# Altium PCB MOTOR_PWR_MS_V1.0.PcbDoc
Units mm, origin at the board's own origin, x right, y up, seen from the top; angles counter-clockwise.
Board outline 26.03 x 34.5 mm, 2 copper layers (Top Layer, Bottom Layer), stack 1.569 mm thick; 3 components, 4 nets, 16 pads, 5 vias.
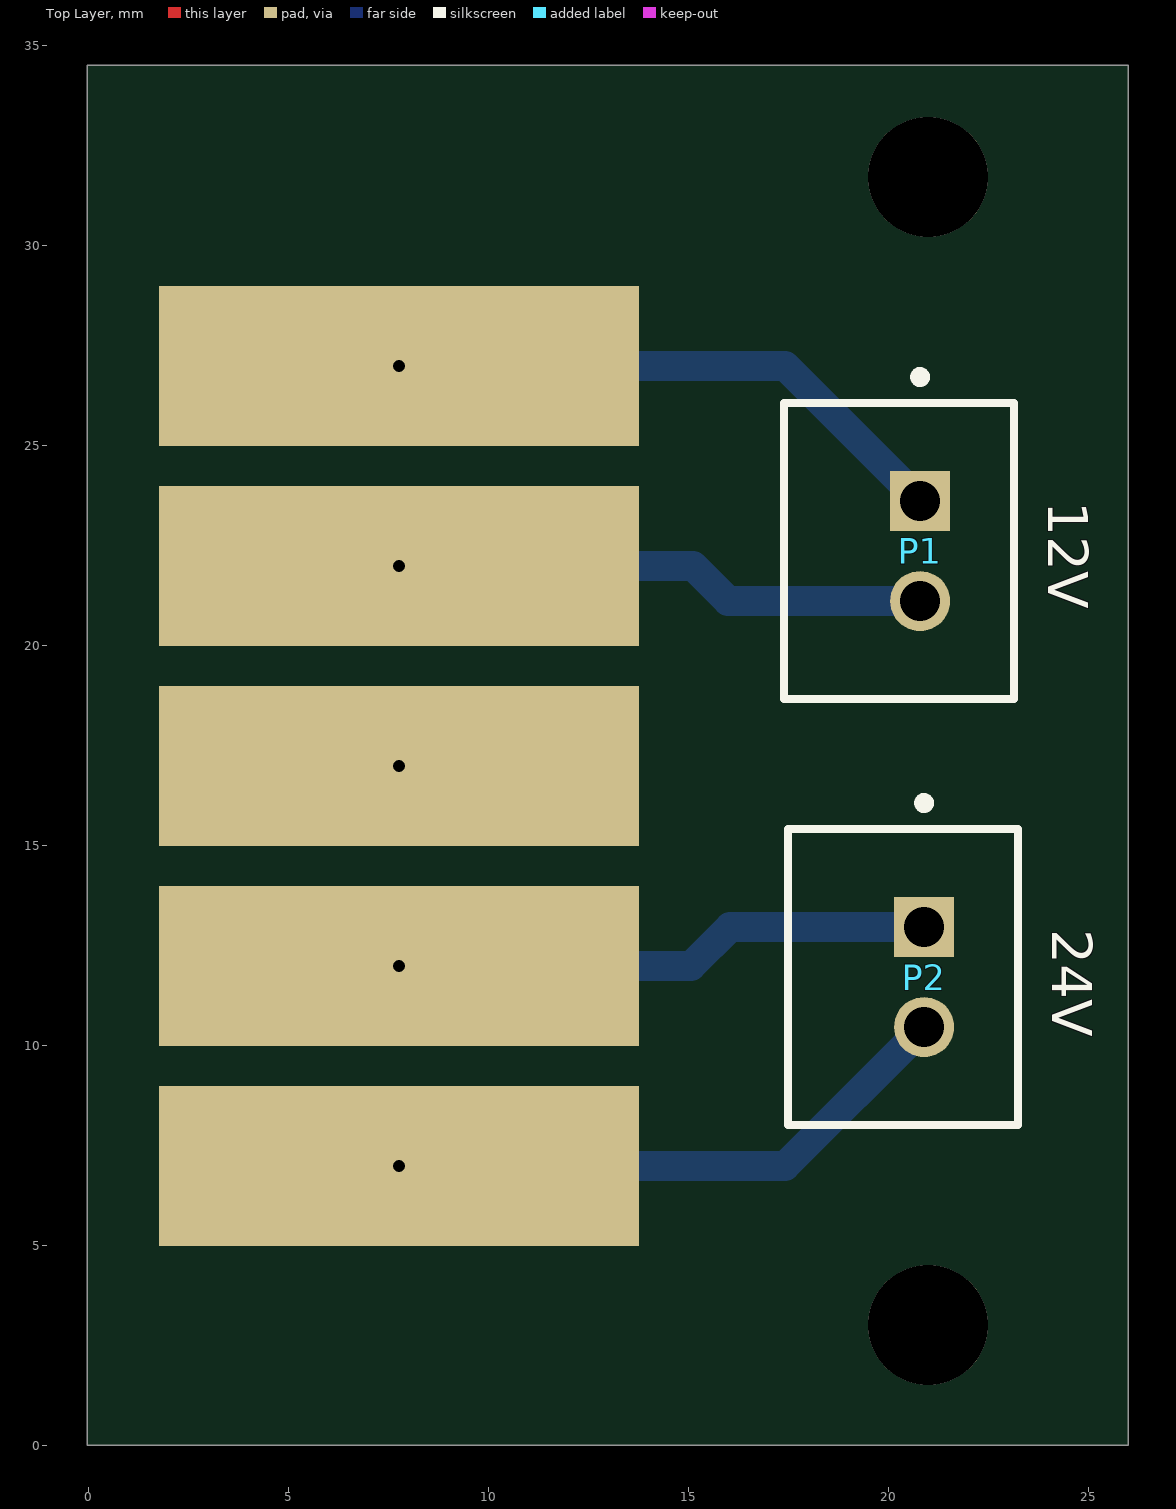
[diagram p0: Top Layer view]
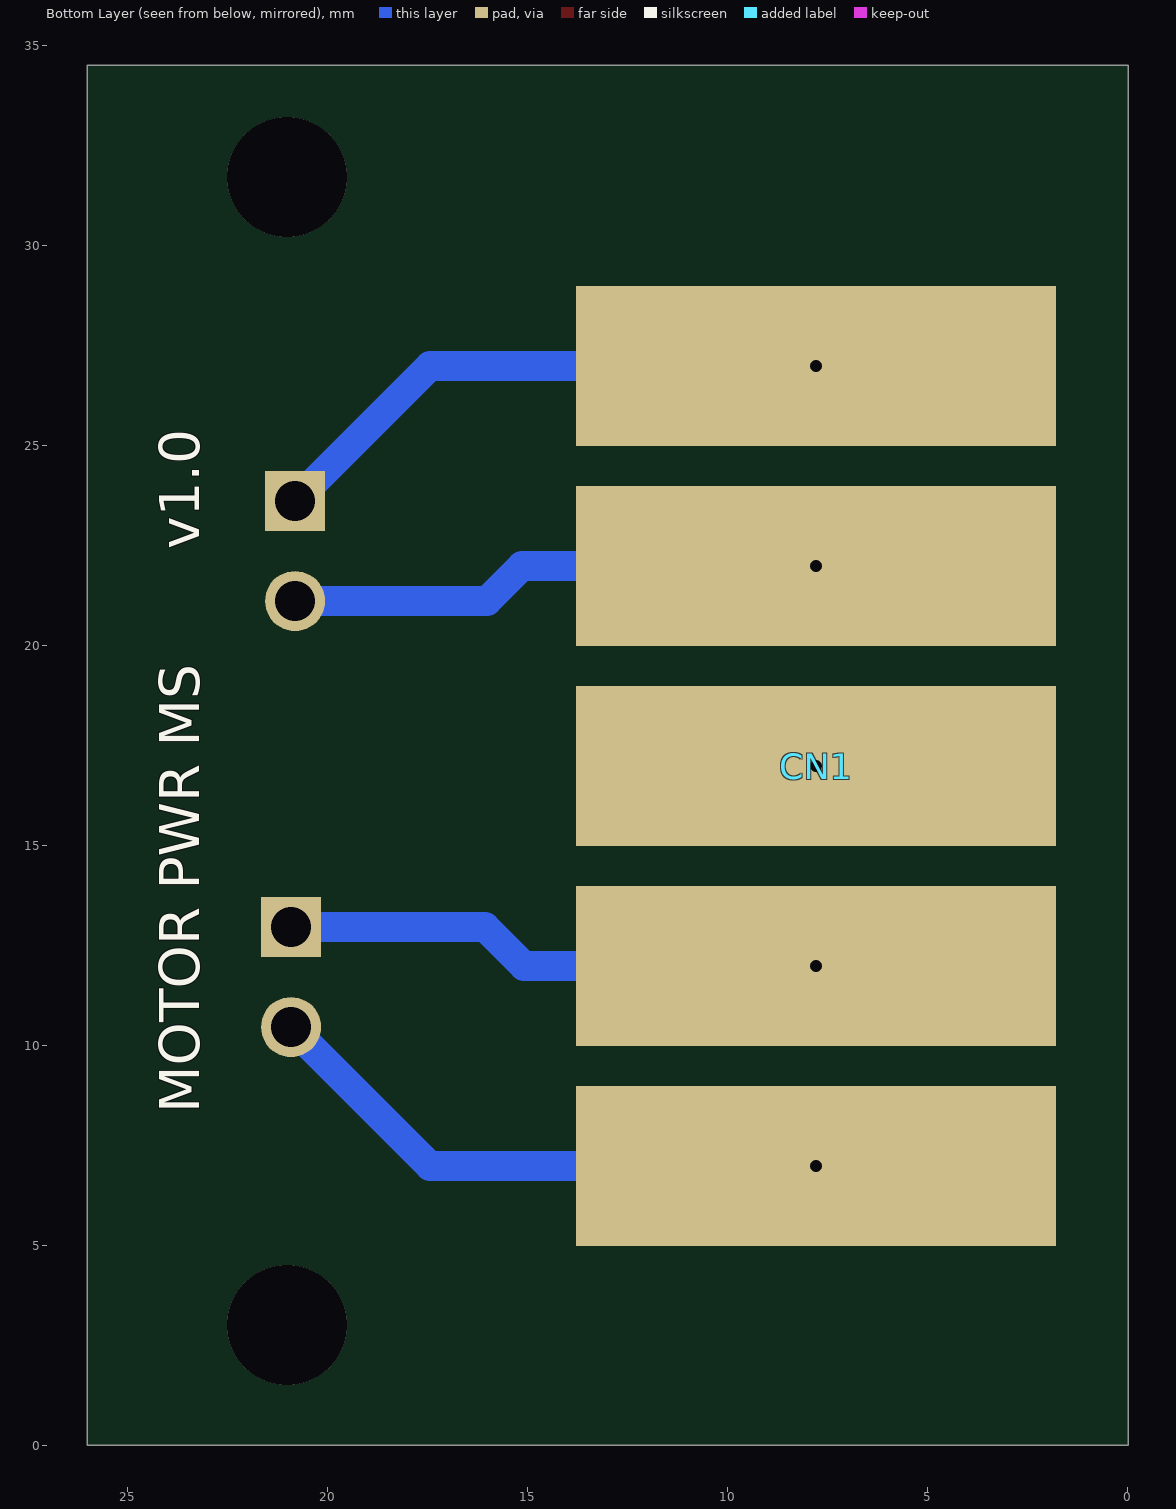
[diagram p1: Bottom Layer view, seen from below]

## Layer stack, top to bottom
Top Solder: solder mask 0.0254, SM-001, Dk 4
Top Layer: signal copper 0.035
Dielectric 1: core 1.4986, Core-043, Dk 4.3
Bottom Layer: signal copper 0.035
Bottom Solder: solder mask 0.0254, SM-001, Dk 4

## Board outline
-0.027,0 26,0 26,34.5 -0.027,34.5

## Design rules (kind name [scope] priority, off if disabled: settings)
Clearance [All] p1: gap=0.254 ignorepadtopadclearanceinfootprint=FALSE except(0: Arc-Hole Track-Hole SMDPad-Hole THPad-Hole Via-Hole Fill-Hole Poly-Hole Region-Hole Text-Hole)
HoleSize [All] p1: absolutevalues=TRUE maxlimit=4 minlimit=0.025 maxpercent=80.000 minpercent=20.000
PolygonConnect [All] p1: connectstyle=Relief reliefconductorwidth=0.254 reliefentries=4 polygonreliefangle="90 Angle" airgapwidth=0.254
RoutingVias [All] p1: holewidth=0.711 width=1.27 viastyle="Through Hole" minholewidth=0.711 minwidth=1.27 maxholewidth=0.711 maxwidth=1.27
SolderMaskExpansion [All] p1: expansion=0.102 istentingtop=FALSE
Width [All] p1: maxlimit=1 minlimit=0.254 preferedwidth=0.254
29 further rules are at their usual default settings.

## Components (designator, comment, footprint, x,y, rotation, side; value= is the part's Value field where it differs from the comment)
CN1 "Component_1" 787328-1 7.771,6.974 r0 bottom
P1 "B2B-XH-A(LF)(SN)" JST-B2B-XH-A_V 20.8,22.35 r270 top
P2 "B2B-XH-A(LF)(SN)" JST-B2B-XH-A_V 20.9,11.7 r270 top

## Footprints (in the part's own frame and the unit in brackets; to place one, negate y for a bottom-side part, rotate by r counter-clockwise, add the part's x,y. Pads: shape width x height; smd on the part's side, far side on the other; paste and mask are expansions set on the pad)
787328-1 [mm]
  rect 12x4 smd: 1(0,0) 2(0,-5) 3(0,-10) 4(0,-15) 5(0,-20)
  rect 12x4 smd far side: 1(0,0) 2(0,-5) 3(0,-10) 4(0,-15) 5(0,-20)
JST-B2B-XH-A_V [mm] "Header, 2-Leads, Body 7.4x5.75mm, Pitch 2.5mm"
  rect 1.5x1.5 hole 1: 1(-1.25,0)
  round 1.5 hole 1: 2(1.25,0)
  silkscreen extent -4.47,-3.4 3.7,2.35, body extent -3.7,-3.4 3.7,2.35, height 7

## Part data
P1 P2: library part CMP-2000-05888-1, "Male Header, Pitch 2.5 mm, 1 x 2 Position, Height 7 mm, Tail Length 3.4 mm, -25 to 85 degC, RoHS, Bulk", Manufacturer=JST, Package Description="Male Header, Pitch 2.5 mm, 1 x 2 Position, Height 7 mm, Tail Length 3.4 mm", Package Reference=B2B-XH-A, Datasheet URL=http://www.jst-mfg.com/product/pdf/eng/eXH.pdf, Datasheet Version=05/2016, Manufacturer URL=http://www.jst.com/home2.html, Mounting Technology=ThroughHole, No of Positions=2, Pitch=2.5mm, Style/Orientation=StraightHeader/Plug, Termination=Crimp, Type=ShroudedHeader

## Free pads (board coordinates)
  round 3 hole 3 unplated: ""(21,3) ""(21,31.7)

## Via types
v1: diameter 0.6, hole 0.3, Top Layer to Bottom Layer, 4 vias
v2: diameter 0.6/0.6 (per signal layer), hole 0.3, Top Layer to Bottom Layer, 1 vias

## Nets (pads, with @x,y where several pads share a name; then routed paths per layer and width w, separated by ;. In a path a pad name is that pad's centre, name@x,y a point inside that pad or via, vN(x,y) a via of type N, cw(c..) or ccw(c..) an arc to the next point about the centre after c; other vN are vias at no path point)
+12V: CN1.4 P1.2 | length 13.4
  Bottom Layer w0.75: v1(7.771,21.974) 15.126,21.974 16,21.1 P1.2
+24V: CN1.1 P2.2 | length 14.6
  Bottom Layer w0.75: v1(7.771,6.974) 17.424,6.974 P2.2
MGND: CN1.2 P2.1 | length 13.5
  Bottom Layer w0.75: v2(7.771,11.974) 15.074,11.974 16.05,12.95 P2.1
PGND: CN1.5 P1.1 | length 14.4
  Bottom Layer w0.75: v1(7.771,26.974) 17.426,26.974 P1.1
pads on no net: CN1.3
copper on no net:
  other v1: 7.771,16.974

## Silkscreen, mask and mechanical layers (free items; w line width, h text height)
Top Overlay:
  text "12V" at 24,23.6 h1 r270
  text "24V" at 24.1,12.9 h1 r270
Bottom Overlay:
  text "v1.0" at 23.2,22.4 h1 r270
  text "MOTOR PWR MS" at 23.2,8.3 h1 r270